# Altium PCB PCB1Good1.PcbDoc (part 2 of 2)
Units mm, origin at the board's own origin, x right, y up, seen from the top; angles counter-clockwise.
Board outline 152.4 x 101.6 mm, 2 copper layers (Top Layer, Bottom Layer); 118 components, 130 nets, 525 pads, 93 vias.
Unrouted connection lines stored in the file: 31.
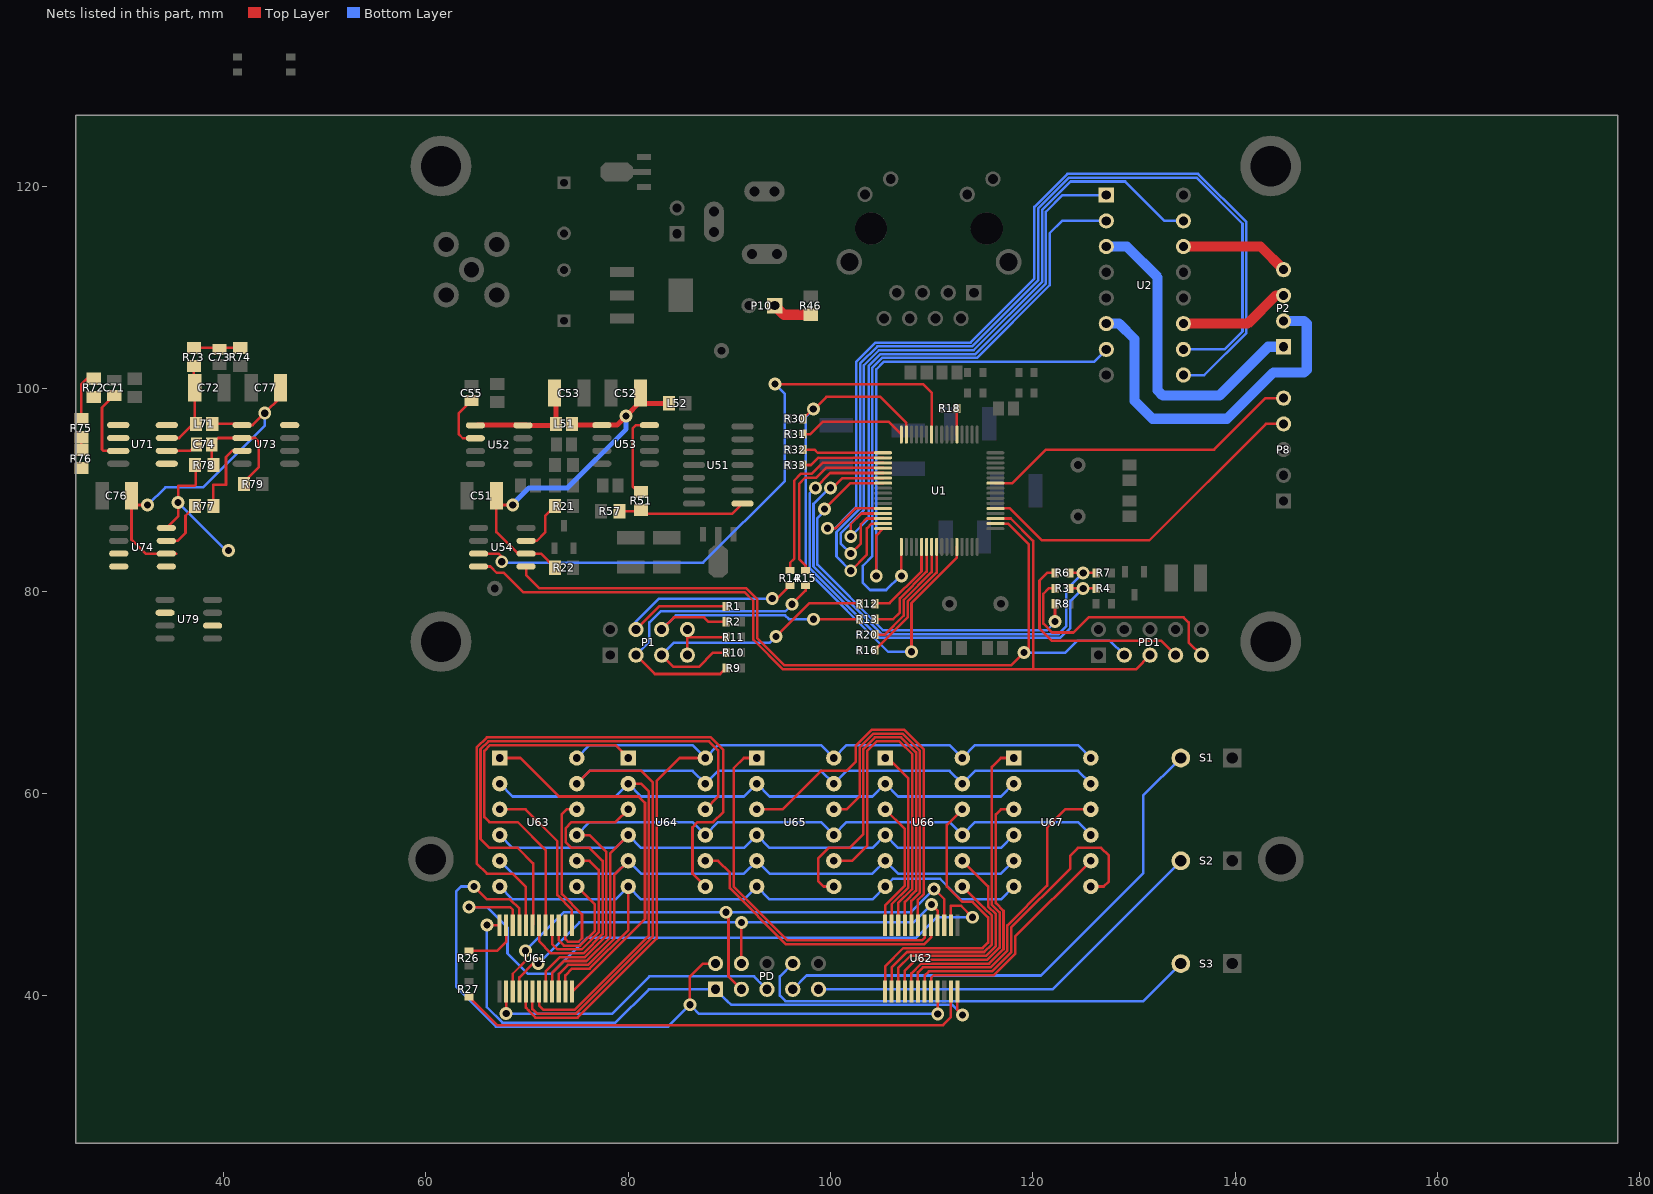
[diagram p2: the nets of this part, all layers, seen from the top]

## Via types
v1: diameter 1.27, hole 0.711, Top Layer to Bottom Layer, 92 vias
v2: diameter 1.27, hole 0.711, Top Layer to Bottom Layer, tented top, 1 vias

## Nets (pads, with @x,y where several pads share a name; then routed paths per layer and width w, separated by ;. In a path a pad name is that pad's centre, name@x,y a point inside that pad or via, vN(x,y) a via of type N, cw(c..) or ccw(c..) an arc to the next point about the centre after c; other vN are vias at no path point) (continued)
NetC51_1: C51.1 C52.1 C76.1 C77.1 L51.2 L52.1 L71.2 R22.2 U53.1 U54.6 U73.1 U74.6 U79.2 | length 76.5
  Top Layer w0.254: C76.1@30.914,89.408 C76.1@30.914,88.5 ; v1(32.5,88.5) C76.1@30.914,88.5 ; 35.307,83.693 U74.6@34.354,83.693 32.307,83.693 30.914,85.086 C76.1@30.914,88.5 ; L71.2@38.9,96.52 U73.1@41.719,96.52 ; U73.1@41.846,96.393 42.893,96.393 v1(44.079,97.579) 45.646,99.146 C77.1@45.646,100.076 ; C51.1@66.982,89.408 C51.1@66.982,88.5 ; v1@68.8,88.5 v1(68.6,88.5) C51.1@66.982,88.5 ; R22.2@72.76,82.296 71.363,83.693 U54.6@69.914,83.693 69.107,83.693 66.982,85.818 C51.1@66.982,88.5 ; L51.2@74.46,96.52 L51.2@74.587,96.393 ; U53.1@77.221,96.451 77.279,96.393 U53.1@77.406,96.393 ; C52.1@81.36,98.552 81.206,98.706 C52.1@81.206,99.568 C52.1@81.714,99.06
  Top Layer w0.5: L51.2@74.587,96.393 U53.1@77.279,96.393 ; U53.1@77.406,96.393 78.893,96.393 v1(79.8,97.3) C52.1@81.206,98.706 ; C52.1@81.36,98.552 L52.1@84.036,98.552
  Bottom Layer w0.254: v1(32.5,88.5) 34.25,90.25 38,90.25 44.079,96.329 v1(44.079,97.579) ; v1(68.6,88.5) 68.7,88.4 v1@68.7,88.7
  Bottom Layer w0.5: v1@68.7,88.7 70.2,90.2 74,90.2 79.8,96 v1(79.8,97.3)
NetC53_2: C53.2 U52.1 | length 11.6
  Top Layer w0.254: 70.061,96.266 70.315,96.52 ; 72.71,96.37 72.86,96.52 ; C53.2@72.718,99.568 C53.2@72.86,99.426
  Top Layer w0.5: U52.1@65.087,96.393 69.934,96.393 ; 69.602,96.37 72.71,96.37 ; 72.86,96.52 C53.2@72.86,99.426
NetC55_2: C55.2 U52.2 | length 5.7
  Top Layer w0.254: C55.2@64.516,98.818 63.246,97.548 63.246,95.504 63.65,95.1 U52.2@64.902,95.1
NetC71_2: C71.2 R72.1 U71.3 | length 6.5
  Top Layer w0.254: U71.3@28.588,93.853 28.147,93.853 28,94 28,97.5 28,98.12 C71.2@29.206,99.326
NetC72_2: C72.2 L71.1 R73.2 U71.7 | length 9.2
  Top Layer w0.254: U71.7@34.404,95.123 35.623,95.123 36.75,96.25 37.03,96.25 L71.1@37.3,96.52 37.158,96.662 C72.2@37.158,100.076 ; C72.2@37.084,100.15 R73.2@37.084,102.224
NetC73_2: C73.2 R72.2 R73.1 R74.2 R75.2 | length 9.5
  Top Layer w0.254: R75.2@25.958,97.008 25.958,100.458 26.476,100.976 R72.2@27.174,100.976 ; R73.1@37.084,104.024 R74.2@41.656,104.024
NetC74_1: C74.1 R76.1 U71.6 | length 3.2
  Top Layer w0.254: U71.6@34.404,93.853 36.715,93.853 C74.1@37.35,94.488
NetC74_2: C74.2 R78.1 R79.2 U73.2 | length 11.5
  Top Layer w0.254: R78.1@39,92.456 38.85,92.606 C74.2@38.85,94.488 39.485,95.123 U73.2@41.846,95.123 43.127,95.123 43.5,94.75 43.5,92.25 R79.2@42.231,90.981
NetC75_2: R78.2 U74.8 U79.6 | length 15.9
  Top Layer w0.254: U74.8@33.733,86.233 U74.8@33.983,86.233 ; U74.8@34.354,86.233 35.536,87.415 35.536,90.424 37.174,90.424 37.25,90.5 37.25,92.406 R78.2@37.2,92.456 ; v1@40.281,84.219 v1(40.5,84)
  Bottom Layer w0.254: v1(35.5,88.75) 40.25,84 v1(40.5,84)
NetL51_1: L51.1 U52.8
NetP1_3: P1.3 R9.1 R15.1 | length 31.1
  Top Layer w0.254: P1.3@80.772,73.66 82.632,71.8 89.084,71.8 R9.1@89.674,72.39 ; v1@96.266,78.74 96.226,78.7 v1(96.2,78.7) 97.536,80.036 R15.1@97.536,80.53
  Bottom Layer w0.254: P1.3@80.772,73.66 82.1,74.988 82.1,76.9 83.2,78 95.526,78 96.226,78.7 v1(96.2,78.7)
NetP1_4: P1.4 R1.1 R14.1 | length 27.3
  Top Layer w0.254: P1.4@80.772,76.2 83.058,78.486 R1.1@89.674,78.486 ; v1(94.234,79.248) 94.73,79.248 R14.1@96.012,80.53
  Bottom Layer w0.254: P1.4@80.772,76.2 80.772,76.972 83.048,79.248 v1(94.234,79.248)
NetP1_5: P1.5 R10.1 R12.1 | length 29.1
  Top Layer w0.254: P1.5@83.312,73.66 84.472,72.5 86.986,72.5 88.4,73.914 R10.1@89.674,73.914 ; v1(94.6,75.5) 97.9,78.8 R12.1@102.882,78.8
  Bottom Layer w0.254: P1.5@83.312,73.66 84.552,74.9 87,74.9 94,74.9 v1(94.6,75.5)
NetP1_6: P1.6 R2.1 R13.1 | length 27.3
  Top Layer w0.254: P1.6@83.312,76.2 84.512,77.4 87.5,77.4 87.938,76.962 R2.1@89.674,76.962 ; v1(98.316,77.216) R13.1@102.882,77.216
  Bottom Layer w0.254: P1.6@83.312,76.2 84.712,77.6 95.5,77.6 95.884,77.216 v1(98.316,77.216)
NetP1_7: P1.7 P1.8 R11.1 | length 6.4
  Top Layer w0.254: P1.7@85.852,73.66 P1.8@85.852,76.2 ; 85.852,75.438 86.614,75.438 R11.1@89.674,75.438
NetP2_1: P2.1 U2.3 | length 32.2
  Bottom Layer w1: U2.3@127.254,114.046 129.286,114.046 132.334,110.998 132.334,99.822 132.842,99.314 138.43,99.314 143.256,104.14 P2.1@144.78,104.14
NetP2_2: P2.2 U2.6 | length 36.2
  Bottom Layer w1: U2.6@127.254,106.426 128.524,106.426 130.048,104.902 130.048,98.806 131.826,97.028 139.192,97.028 143.764,101.6 146.812,101.6 147.066,101.854 147.066,106.426 146.812,106.68 P2.2@144.78,106.68
NetP2_3: P2.3 U2.11 | length 11.1
  Top Layer w1: U2.11@134.874,106.426 141.224,106.426 144.018,109.22 P2.3@144.78,109.22
NetP2_4: P2.4 U2.14 | length 10.9
  Top Layer w1: U2.14@134.874,114.046 142.494,114.046 P2.4@144.78,111.76
NetP8_4: P8.4 U1.37 | length 34.6
  Top Layer w0.254: U1.37@116.294,88.166 117.734,88.166 120.9,85 131.5,85 143.02,96.52 P8.4@144.78,96.52
NetP8_5: P8.5 U1.42 | length 32
  Top Layer w0.254: U1.42@116.294,90.666 117.966,90.666 121.28,93.98 127.793,93.98 137.922,93.98 143.002,99.06 P8.5@144.78,99.06
NetP10_1: P10.1 R46.2 | length 3.9
  Top Layer w1: P10.1@94.488,108.204 95.388,107.304 R46.2@98.044,107.304
NetPD1_7: PD1.7 R6.1 | length 21.1
  Top Layer w0.254: R6.1@122.186,81.788 121.412,81.788 120.65,81.026 120.65,76.296 121.846,75.1 132.672,75.1 PD1.7@134.112,73.66
NetPD1_9: PD1.9 R3.2 | length 23.8
  Top Layer w0.254: R3.2@122.186,80.264 121.564,80.264 121.031,79.731 121.031,76.769 121.9,75.9 124,75.9 125.5,77.4 134.904,77.4 135.4,76.904 135.4,74.912 PD1.9@136.652,73.66 PD1.9@136.652,73.848
NetPD_1: PD.1 U61.24 U62.24 | length 61.9
  Top Layer w0.254: v1(66.04,46.99) 66.067,46.963 U61.24@67.291,46.963 ; U62.24@112.541,40.413 112.541,38.589 v1(113.03,38.1)
  Bottom Layer w0.254: v1(66.04,46.99) 66.04,38.862 67.56,37.342 78.744,37.342 82.042,40.64 PD.1@88.646,40.64 89.789,39.497 90.196,39.09 106.654,39.09 110.223,39.09 112.04,39.09 v1(113.03,38.1)
NetPD_2: PD.2 U61.21 U62.21 | length 77.3
  Top Layer w0.254: v1(64.77,50.8) 66.04,49.53 68.326,49.53 69.241,48.615 U61.21@69.241,46.963 ; v1(86.106,39.116) 86.106,41.91 87.376,43.18 PD.2@88.646,43.18 ; v1@110.49,38.1 v1(110.591,38.201) U62.21@110.591,40.413
  Bottom Layer w0.254: v1(64.77,50.8) 63.5,50.8 62.992,50.292 62.992,40.894 66.925,36.961 83.951,36.961 v1(86.106,39.116) 86.106,38.862 86.36,38.862 87.021,38.201 99.984,38.201 v1(110.591,38.201)
NetPD_3: PD.3 U61.3 U62.3 | length 59.9
  Top Layer w0.254: U61.3@68.591,40.413 68.591,42.175 69.85,43.434 v1(69.85,44.45) ; v1(89.662,48.26) 89.662,47.752 89.916,47.752 89.916,41.91 PD.3@91.186,40.64 ; v1(110.236,50.546) 111.241,49.541 U62.3@111.241,46.963
  Bottom Layer w0.254: v1(69.85,44.45) 73.66,48.26 v1(89.662,48.26) 107.95,48.26 v1(110.236,50.546)
NetPD_4: PD.4 U61.4 U62.4 | length 51.5
  Top Layer w0.254: U61.4@69.241,40.413 69.241,41.809 70.612,43.18 v1(71.12,43.18) ; PD.4@91.186,43.18 v1(91.186,47.244) ; v1(109.982,49.022) 110.591,48.413 U62.4@110.591,46.963
  Bottom Layer w0.254: v1(71.12,43.18) 75.184,47.244 v1(91.186,47.244) 108.204,47.244 v1(109.982,49.022)
NetPD_5: PD.5 U61.2 | length 30
  Top Layer w0.254: v1(67.941,38.231) U61.2@67.941,40.413
  Bottom Layer w0.254: v1(67.941,38.231) 78.431,38.231 82.11,41.91 92.456,41.91 PD.5@93.726,40.64
NetPD_7: PD.7 S1.2 | length 52.3
  Bottom Layer w0.254: PD.7@96.266,40.64 97.626,42 120.8,42 130.9,52.1 130.9,59.78 S1.2@134.62,63.5
NetPD_8: PD.8 S3.2 | length 45.1
  Bottom Layer w0.254: PD.8@96.266,43.18 94.986,41.9 94.986,40.014 95.529,39.471 130.911,39.471 S3.2@134.62,43.18
NetPD_9: PD.9 S2.2 | length 41.1
  Bottom Layer w0.254: PD.9@98.806,40.64 121.92,40.64 S2.2@134.62,53.34
NetR3_1: R3.1 R4.1 U1.5 | length 51.7
  Top Layer w0.254: v1(98.5,90.2) 99.966,91.666 U1.5@105.194,91.666 ; R3.1@123.686,80.264 v1(124.968,80.264) R4.1@126.25,80.264
  Bottom Layer w0.254: v1@98.65,90.35 97.938,89.638 97.938,82.284 104.859,75.363 122.694,75.363 123.698,76.367 123.698,78.994 v1(124.968,80.264)
NetR6_2: R6.2 R7.1 U1.6 | length 50.6
  Top Layer w0.254: v1(100,90.2) 100.2,90.2 101.166,91.166 U1.6@105.194,91.166 ; R6.2@123.686,81.788 v1(124.968,81.788) R7.1@126.25,81.788
  Bottom Layer w0.254: v1@100,90 99.7,90 98.319,88.619 98.319,82.442 105.017,75.744 122.536,75.744 123.317,76.525 123.317,80.137 v1(124.968,81.788)
NetR8_1: R8.1 U1.7 | length 41.2
  Top Layer w0.254: v1@99.529,87.971 v1(99.4,88.1) 101.966,90.666 U1.7@105.194,90.666 ; v1@122.174,76.962 v1(122.186,76.974) R8.1@122.186,78.74
  Bottom Layer w0.254: v1(99.4,88.1) 99.4,87.9 98.7,87.2 98.7,82.6 105.175,76.125 121.412,76.125 122.186,76.899 v1(122.186,76.974)
NetR12_2: R12.2 U1.21 | length 8.3
  Top Layer w0.254: R12.2@104.382,78.8 105.845,78.8 108.994,81.949 U1.21@108.994,84.366
NetR13_2: R13.2 U1.22 | length 10.3
  Top Layer w0.254: R13.2@104.382,77.216 106.2,77.216 106.857,77.873 106.857,79.273 109.494,81.91 U1.22@109.494,84.366
NetR14_2: R14.2 U1.3 | length 18.6
  Top Layer w0.254: R14.2@96.012,82.03 96.012,82.796 96.4,83.184 96.4,90.9 97.1,91.6 98.161,91.6 99.227,92.666 U1.3@105.194,92.666
NetR15_2: R15.2 U1.4 | length 17.8
  Top Layer w0.254: R15.2@97.536,82.03 97.536,82.518 96.9,83.154 96.9,90.6 97.5,91.2 98.6,91.2 99.566,92.166 U1.4@105.194,92.166
NetR16_2: R16.2 U1.24 | length 12.7
  Top Layer w0.254: R16.2@104.382,74.168 104.384,74.168 107.619,77.403 107.619,78.958 110.494,81.833 U1.24@110.494,84.366
NetR18_2: R18.2 U1.53 | length 2.6
  Top Layer w0.254: U1.53@112.494,95.466 R18.2@112.494,98.044
NetR20_2: R20.2 U1.23 | length 11.6
  Top Layer w0.254: R20.2@104.382,75.692 105.37,75.692 107.238,77.56 107.238,79.116 109.994,81.872 U1.23@109.994,84.366
NetR21_1: R21.1 U54.7 | length 5.9
  Top Layer w0.254: U54.7@70.637,84.963 U54.7@69.914,84.963 70.963,84.963 71.8,85.8 71.8,87.432 R21.1@72.76,88.392
NetR26_2: R26.2 U61.23 | length 5.7
  Top Layer w0.254: R26.2@64.262,44.438 67.044,44.438 67.941,45.335 U61.23@67.941,46.963
NetR27_2: R27.2 U62.23 | length 51.6
  Top Layer w0.254: R27.2@64.262,39.89 67.052,37.1 111.113,37.1 111.891,37.878 U62.23@111.891,40.413
NetR30_1: R30.1 U1.28 U1.63 | length 56
  Top Layer w0.254: R30.1@97.27,97.028 98.242,98 v1(98.3,98) ; v1@98,97.6 98.7,98.3 99.581,99.181 104.919,99.181 107.494,96.606 U1.63@107.494,95.466 ; v1(108,74) 108,78.8 112.494,83.294 U1.28@112.494,84.366
  Bottom Layer w0.254: v1(98.3,98) 98.211,97.911 97.557,97.257 97.557,82.127 105.684,74 v1(108,74)
NetR31_1: R31.1 U1.64 | length 11.1
  Top Layer w0.254: R31.1@97.516,95.75 R31.1@97.27,95.504 98.004,95.504 99.25,96.75 105.71,96.75 U1.64@106.994,95.466
NetR32_1: R32.1 U1.1 | length 8.1
  Top Layer w0.254: R32.1@97.27,93.98 98.42,93.98 98.734,93.666 U1.1@105.194,93.666
NetR33_1: R33.1 U1.2 | length 8.2
  Top Layer w0.254: R33.1@97.27,92.456 98.056,92.456 98.766,93.166 U1.2@105.194,93.166
NetR51_1: R51.1 R57.2 U51.8 | length 12.8
  Top Layer w0.254: R57.2@79.132,87.884 81.164,87.884 R51.1@81.28,88 81.65,87.63 90.284,87.63 U51.8@91.3,88.646
NetR51_2: R51.2 U53.8 U73.8 | length 8.5
  Top Layer w0.254: R51.2@81.2,89.546 80.438,90.308 80.438,96.059 80.772,96.393 U53.8@81.979,96.393
NetR75_1: R75.1 R76.2 U71.2 | length 1.2
  Top Layer w0.254: R76.2@25.958,93.96 R75.1@25.958,95.208
NetR77_1: R77.1 U73.3 | length 8
  Top Layer w0.254: R77.1@39,88.392 39,90.5 40.25,90.5 40.25,93.25 40.853,93.853 U73.3@41.846,93.853
NetR77_2: R77.2 U74.7 | length 4.9
  Top Layer w0.254: U74.7@34.713,84.963 35.463,84.963 36.25,85.75 36.25,87.442 R77.2@37.2,88.392
NetU1_12: U1.12 U2.9 | length 96.6
  Top Layer w0.254: v1(99.7,86.2) 99.7,86.6 100.1,86.2 100.5,86.2 102.466,88.166 U1.12@105.194,88.166
  Bottom Layer w0.254: v1@99.7,86.6 v1(99.7,86.2) 100.422,86.2 101.933,87.711 102.538,88.316 102.538,102.632 104.465,104.559 113.834,104.559 120.142,110.867 120.142,117.958 123.422,121.238 136.318,121.238 141.097,116.459 141.097,105.506 136.937,101.346 U2.9@134.874,101.346
NetU1_13: U1.13 U2.1 | length 57
  Top Layer w0.254: v1(102,85.4) 102,86.6 103.066,87.666 U1.13@105.194,87.666
  Bottom Layer w0.254: v1(102,85.4) 103.759,87.159 103.759,102.237 104.938,103.416 114.307,103.416 121.285,110.394 121.285,117.485 122.926,119.126 U2.1@127.254,119.126
NetU1_14: U1.14 U2.15 | length 70.6
  Top Layer w0.254: v1(102,83.7) 103,84.7 103,86.6 103.566,87.166 U1.14@105.194,87.166
  Bottom Layer w0.254: v1(102,83.7) 101,84.7 101,85.7 102.249,86.949 103.3,88 103.3,102.316 104.781,103.797 114.149,103.797 120.904,110.552 120.904,117.643 123.737,120.476 129.124,120.476 133.014,116.586 U2.15@134.874,116.586
NetU1_15: U1.15 U2.10 | length 97.3
  Top Layer w0.254: v2(102,82) 103.6,83.6 103.6,86.2 104.066,86.666 U1.15@105.194,86.666
  Bottom Layer w0.254: v2(102,82) 100.589,83.411 100.589,85.828 102.091,87.33 102.919,88.158 102.919,102.474 104.623,104.178 113.992,104.178 120.523,110.709 120.523,117.801 123.579,120.857 136.16,120.857 140.716,116.301 140.716,105.664 138.938,103.886 U2.10@134.874,103.886
NetU1_16: U1.16 U2.7 | length 48.9
  Top Layer w0.254: v1(104.521,81.5) 104.521,85.493 U1.16@105.194,86.166
  Bottom Layer w0.254: v1(104.521,81.5) 104.521,101.921 105.254,102.654 123.712,102.654 126.022,102.654 U2.7@127.254,103.886
NetU1_17: U1.17 U2.2 | length 61.3
  Top Layer w0.254: U1.17@106.994,84.366 v1(107,81.5)
  Bottom Layer w0.254: v1(107,81.5) 106.9,81.5 105.5,80.1 103.9,80.1 103.2,80.8 103.2,82.5 104.14,83.44 104.14,102.079 105.096,103.035 114.465,103.035 121.666,110.236 121.666,115.366 122.886,116.586 U2.2@127.254,116.586
NetU61_5: U61.5 U63.12 U64.12 U65.12 U66.12 U67.12 | length 94.8
  Top Layer w0.254: U61.5@69.891,40.413 69.891,38.821 70.16,38.552 70.16,38.521 70.835,37.846 74.992,37.846 82.804,45.658 82.804,61.214 85.09,63.5 U64.12@87.63,63.5
  Bottom Layer w0.254: U63.12@74.93,63.5 76.2,64.77 86.36,64.77 U64.12@87.63,63.5 88.9,64.77 99.06,64.77 U65.12@100.33,63.5 101.6,64.77 111.76,64.77 U66.12@113.03,63.5 114.3,64.77 124.46,64.77 U67.12@125.73,63.5 U67.12@125.476,63.5
NetU61_6: U61.6 U63.11 U64.11 U65.11 U66.11 U67.11 | length 95.7
  Top Layer w0.254: U61.6@70.541,40.413 70.541,38.679 70.993,38.227 71.47,38.227 74.834,38.227 82.423,45.816 82.423,61.118 81.311,62.23 76.2,62.23 U63.11@74.93,60.96
  Bottom Layer w0.254: U63.11@74.93,60.96 76.2,62.23 86.36,62.23 U64.11@87.63,60.96 88.9,62.23 99.06,62.23 U65.11@100.33,60.96 101.6,62.23 111.76,62.23 U66.11@113.03,60.96 114.3,62.23 124.46,62.23 U67.11@125.73,60.96
NetU61_7: U61.7 U63.2 U64.2 U65.2 U66.2 U67.2 | length 87
  Top Layer w0.254: U61.7@71.191,40.413 71.191,39.045 71.628,38.608 74.676,38.608 82.042,45.974 82.042,60.198 81.28,60.96 U64.2@80.01,60.96
  Bottom Layer w0.254: U63.2@67.31,60.96 68.58,59.69 78.74,59.69 U64.2@80.01,60.96 81.28,59.69 91.44,59.69 U65.2@92.71,60.96 93.98,59.69 104.14,59.69 U66.2@105.41,60.96 106.68,59.69 116.84,59.69 U67.2@118.11,60.96
NetU61_8: U61.8 U63.9 U64.9 U65.9 U66.9 U67.9 | length 76.4
  Top Layer w0.254: U61.8@71.841,40.413 71.841,42.377 73.279,43.815 75.727,43.815 77.851,45.939 77.851,54.229 76.2,55.88 U63.9@74.93,55.88
  Bottom Layer w0.254: U63.9@74.93,55.88 76.2,57.15 86.36,57.15 U64.9@87.63,55.88 88.9,57.15 99.06,57.15 U65.9@100.33,55.88 101.6,57.15 111.76,57.15 U66.9@113.03,55.88 114.3,57.15 124.46,57.15 U67.9@125.73,55.88
NetU61_9: U61.9 U63.4 U64.4 U65.4 U66.4 U67.4 | length 74.9
  Top Layer w0.254: U61.9@72.491,40.413 72.491,42.265 73.66,43.434 75.884,43.434 78.232,45.782 78.232,54.102 U64.4@80.01,55.88
  Bottom Layer w0.254: U63.4@67.31,55.88 68.58,54.61 78.74,54.61 U64.4@80.01,55.88 81.28,54.61 91.44,54.61 U65.4@92.71,55.88 93.98,54.61 104.14,54.61 U66.4@105.41,55.88 106.68,54.61 116.84,54.61 U67.4@118.11,55.88
NetU61_10: U61.10 U63.5 U64.5 U65.5 U66.5 U67.5 | length 72
  Top Layer w0.254: U61.10@73.141,40.413 73.141,42.153 74.041,43.053 76.042,43.053 78.613,45.624 78.613,51.943 U64.5@80.01,53.34
  Bottom Layer w0.254: U63.5@67.31,53.34 68.58,52.07 78.74,52.07 U64.5@80.01,53.34 81.28,52.07 91.44,52.07 U65.5@92.71,53.34 93.98,52.07 104.14,52.07 U66.5@105.41,53.34 106.68,52.07 116.84,52.07 U67.5@118.11,53.34
NetU61_11: U61.11 U63.6 U64.6 U65.6 U66.6 U67.6 | length 70.1
  Top Layer w0.254: U61.11@73.791,40.413 73.791,42.01 74.453,42.672 76.2,42.672 80.01,46.482 U64.6@80.01,50.673 ; U64.6@79.883,50.673 U64.6@80.01,50.673 ; U64.6@80.01,50.673 80.137,50.673 U64.6@80.01,50.8 U64.6@80.01,50.673
  Bottom Layer w0.254: U63.6@67.31,50.8 68.58,49.53 78.74,49.53 U64.6@80.01,50.8 81.28,49.53 91.44,49.53 U65.6@92.71,50.8 93.98,49.53 104.14,49.53 U66.6@105.41,50.8 106.172,51.562 110.831,51.562 112.863,49.53 113.705,49.53 115.062,49.53 116.84,49.53 U67.6@118.11,50.8
NetU61_12: U61.12 U63.1 | length 37.8
  Top Layer w0.254: U63.1@67.31,63.5 69.342,63.5 73.152,59.69 81.026,59.69 81.661,59.055 81.661,47.594 74.48,40.413 U61.12@74.441,40.413
NetU61_13: U61.13 U63.3 | length 15.9
  Top Layer w0.254: U63.3@67.31,58.42 69.85,58.42 73,55.27 73,49.936 74.441,48.495 U61.13@74.441,46.963
NetU61_14: U61.14 U63.10 | length 18
  Top Layer w0.254: U61.14@73.791,46.963 73.791,45.589 74.041,45.339 75.095,45.339 75.438,45.682 75.438,48.037 73.441,50.034 73.441,57.941 73.92,58.42 U63.10@74.93,58.42
NetU61_15: U61.15 U63.7 | length 11
  Top Layer w0.254: U61.15@73.141,46.963 73.141,45.477 73.66,44.958 75.253,44.958 76.708,46.413 76.708,49.022 U63.7@74.93,50.8
NetU61_16: U61.16 U63.8 | length 16.1
  Top Layer w0.254: U61.16@72.491,46.963 72.491,45.111 73.025,44.577 75.411,44.577 77.089,46.255 77.089,52.451 76.2,53.34 U63.8@74.93,53.34
NetU61_17: U61.17 U64.1 | length 36.4
  Top Layer w0.254: U61.17@71.841,46.963 71.841,50.556 71.841,53.302 71.841,54.397 69.088,57.15 66.294,57.15 65.786,57.658 65.786,64.208 66.348,64.77 78.74,64.77 U64.1@80.01,63.5
NetU61_18: U61.18 U64.3 | length 29.1
  Top Layer w0.254: U61.18@71.191,46.963 71.191,45.395 72.39,44.196 75.569,44.196 77.47,46.097 77.47,53.34 76.2,54.61 74.422,54.61 73.822,55.21 73.822,56.55 74.422,57.15 78.74,57.15 U64.3@80.01,58.42
NetU61_19: U61.19 U64.10 | length 51.8
  Top Layer w0.254: U61.19@70.541,46.963 70.612,47.034 70.612,50.992 70.612,53.086 69.088,54.61 66.294,54.61 65.405,55.499 65.405,64.366 66.19,65.151 88.011,65.151 88.9,64.262 88.9,59.69 U64.10@87.63,58.42
NetU61_20: U61.20 U64.7 | length 62.6
  Top Layer w0.254: U61.20@69.891,46.963 69.891,50.759 68.58,52.07 66.04,52.07 65.024,53.086 65.024,64.524 66.032,65.532 88.169,65.532 89.408,64.293 89.408,58.166 88.392,57.15 86.868,57.15 86.36,56.642 86.36,52.07 U64.7@87.63,50.8
NetU61_22: U61.22 U62.2 | length 66.9
  Top Layer w0.254: v1(64.262,48.768) 68.326,48.768 68.591,48.503 U61.22@68.591,46.963 ; U62.2@111.891,46.963 111.891,48.895 ; 111.891,48.899 111.891,48.895 ; v1(114.046,47.752) 112.903,48.895 111.891,48.895
  Bottom Layer w0.254: v1(64.262,48.768) 66.04,48.768 68.072,46.736 68.072,44.196 70.104,42.164 72.39,42.164 75.946,45.72 83.764,45.72 99.401,45.72 108.458,45.72 110.49,47.752 v1(114.046,47.752)
NetU62_5: U62.5 U64.8 | length 28.1
  Top Layer w0.254: U64.8@87.63,53.34 88.9,53.34 90.043,52.197 90.043,50.642 95.6,45.085 107.03,45.085 107.253,45.085 107.405,45.085 107.425,45.085 109.255,45.085 109.763,45.593 109.941,45.771 U62.5@109.941,46.963
NetU62_6: U62.6 U65.1 | length 36.8
  Top Layer w0.254: U65.1@92.71,63.5 91.44,63.5 90.424,62.484 90.424,50.8 95.758,45.466 106.872,45.466 107.583,45.466 109.035,45.466 109.291,45.722 U62.6@109.291,46.963
NetU62_7: U62.7 U65.3 | length 39.1
  Top Layer w0.254: U65.3@92.71,58.42 95.25,58.42 99.06,62.23 101.6,62.23 102.489,63.119 102.489,64.705 104.078,66.294 107.28,66.294 109.22,64.354 109.22,50.069 108.641,49.49 U62.7@108.641,46.963
NetU62_8: U62.8 U65.10 | length 32.8
  Top Layer w0.254: U65.10@100.33,58.42 101.6,58.42 102.87,59.69 102.87,64.548 104.235,65.913 107.123,65.913 108.839,64.197 108.839,50.227 107.991,49.379 U62.8@107.991,46.963
NetU62_9: U62.9 U65.7 | length 41.9
  Top Layer w0.254: U65.7@100.33,50.546 U65.7@100.33,50.8 99.314,50.8 98.806,51.308 98.806,53.594 99.822,54.61 101.854,54.61 103.251,56.007 103.251,64.39 104.393,65.532 106.965,65.532 108.458,64.039 108.458,50.384 107.341,49.267 U62.9@107.341,46.963
NetU62_10: U62.10 U65.8 | length 36.2
  Top Layer w0.254: U65.8@100.33,53.34 102.14,53.34 103.632,54.832 103.632,64.232 104.551,65.151 106.807,65.151 108.077,63.881 108.077,50.542 106.691,49.156 U62.10@106.691,46.963
NetU62_11: U62.11 U66.1 | length 18.3
  Top Layer w0.254: U66.1@105.41,63.5 105.664,63.5 107.696,61.468 107.696,50.7 106.041,49.045 U62.11@106.041,46.963
NetU62_12: U62.12 U66.3 | length 13
  Top Layer w0.254: U62.12@105.391,46.963 105.391,48.934 107.315,50.858 107.315,56.515 U66.3@105.41,58.42
NetU62_13: U62.13 U66.10 | length 29.7
  Top Layer w0.254: U62.13@105.391,40.413 105.391,42.907 107.188,44.704 115.032,44.704 115.57,45.242 115.57,47.752 114.046,49.276 113.03,49.276 112.331,49.974 111.506,50.8 111.506,56.896 U66.10@113.03,58.42
NetU62_14: U62.14 U66.7 | length 20.2
  Top Layer w0.254: U62.14@106.041,40.413 106.041,42.795 107.569,44.323 109.509,44.323 109.57,44.323 115.19,44.323 115.951,45.084 115.951,47.91 115.189,48.672 113.061,50.8 U66.7@113.03,50.8
NetU62_15: U62.15 U66.8 | length 22.7
  Top Layer w0.254: U62.15@106.691,40.413 106.691,42.755 107.878,43.942 109.666,43.942 109.728,43.942 115.348,43.942 116.332,44.926 116.332,48.068 115.57,48.83 115.57,50.8 U66.8@113.03,53.34
NetU62_16: U62.16 U67.1 | length 33.1
  Top Layer w0.254: U62.16@107.341,40.413 107.341,42.475 108.427,43.561 109.824,43.561 109.886,43.561 115.506,43.561 116.713,44.768 116.713,48.225 115.951,48.987 115.951,50.958 115.951,62.611 116.84,63.5 U67.1@118.11,63.5
NetU62_17: U62.17 U67.3 | length 27.5
  Top Layer w0.254: U62.17@107.991,40.413 107.991,42.205 108.966,43.18 109.982,43.18 110.044,43.18 115.664,43.18 117.094,44.61 117.094,48.383 116.332,49.145 116.332,51.116 116.332,57.912 116.84,58.42 U67.3@118.11,58.42
NetU62_18: U62.18 U67.10 | length 30.5
  Top Layer w0.254: U62.18@108.641,40.413 108.641,42.316 109.124,42.799 115.821,42.799 117.475,44.453 117.475,46.963 121.412,50.9 121.412,56.642 123.19,58.42 U67.10@125.73,58.42
NetU62_19: U62.19 U67.7 | length 32
  Top Layer w0.254: U62.19@109.291,40.413 109.291,41.981 109.728,42.418 115.979,42.418 117.856,44.295 117.856,46.736 123.698,52.578 123.698,53.848 124.46,54.61 126.746,54.61 127.508,53.848 127.508,51.308 127,50.8 U67.7@125.73,50.8
NetU62_20: U62.20 U67.8 | length 22.9
  Top Layer w0.254: U62.20@109.941,40.413 109.941,41.778 110.2,42.037 114.427,42.037 116.137,42.037 118.237,44.137 118.237,45.847 U67.8@125.73,53.34
NetU71_1: U71.1 U71.5 U71.8
SPI_CLK: PD1.3 U1.34 U54.5 U74.5 | length 82.6
  Top Layer w0.254: U54.5@69.914,82.423 69.914,81.586 71.236,80.264 91.675,80.264 92.742,79.197 92.742,75.358 95.456,72.644 117.856,72.644 v1(119.126,73.914) 119.6,74.388 119.6,84.616 117.55,86.666 U1.34@116.294,86.666
  Bottom Layer w0.254: v1(119.126,73.914) 123.214,73.914 124.4,75.1 127.592,75.1 PD1.3@129.032,73.66
SPI_CS: U1.58 U54.3 U74.3 | length 64.1
  Top Layer w0.254: U54.3@65.214,83.693 67.183,83.693 v1@67.564,83.312 ; v1(94.5,100.457) 94.757,100.2 95.014,100.457 99.241,100.457 105.525,100.457 107.582,100.457 109.143,100.457 109.994,99.606 109.994,97.794 U1.58@109.994,95.466
  Bottom Layer w0.254: v1(67.5,82.9) 67.6,82.8 87.4,82.8 95.496,90.896 95.496,99.461 v1(94.5,100.457)
SPI_SD: PD1.5 U1.35 U54.4 U74.4 | length 90.7
  Top Layer w0.254: U54.4@65.214,82.423 66.377,82.423 67.012,81.788 67.712,81.788 68.75,80.75 69.617,79.883 91.517,79.883 92.361,79.039 92.361,75.2 95.298,72.263 120.015,72.263 ; U1.35@116.294,87.166 117.812,87.166 120.015,84.963 120.015,72.263 ; PD1.5@131.572,73.66 130.175,72.263 120.015,72.263
pads on no net: *1.15 *1.16 D1.3 D2.3 RF1.1 RF1.2 RF2.1 RF2.2 U1.8 U1.11 U1.27 U1.31 U1.32 U1.33 U1.36 U1.43 U1.44 U53.7 U62.22 U73.7 U79.1 U79.3 U79.5 U79.7 U79.8
copper on no net: | length 12.5
  Top Layer w0.254: 79.936,31.508 82.476,31.508 ; 80.952,31 82.476,31.508 ; 80.952,32.016 82.476,31.508 ; 82.476,31.254 82.476,31.762 ; 83.726,31.254 83.726,31.762 ; 85.25,31 83.726,31.508 ; 85.25,32.016 83.726,31.508 ; 86.266,31.508 83.726,31.508

## Polygon pours and split planes (outlines as drawn)
GND on Bottom Layer "Bottom Layer-No Net" (solid, pour order 1000): 56.5,127 56.5,70 148.5,70 148.5,127
GND on Bottom Layer "Bottom Layer-No Net" (solid, pour order 1000): 56.539,69.5 148.5,69.5 148.5,35 56.539,35
GND on Top Layer "Bottom Layer-No Net" (solid, remove dead copper, pour order 1001): 56.5,127 56.5,70 148.5,70 148.5,127
GND on Top Layer "Bottom Layer-No Net" (solid, pour order 1001): 56.5,69.5 148.5,69.5 148.5,35 56.5,35

## Other copper
Top Layer:
  text "1.25 (mm)" at 76.982,27.851 h1.52

## Silkscreen, mask and mechanical layers (free items; w line width, h text height)
Top Overlay:
  lines w0.254: 54.5,36.5 55.008,34.976 ; 54.5,125.452 55.008,126.976 ; 54.754,34.976 55.262,34.976 ; 54.754,126.976 55.262,126.976 ; 55.008,75.872 55.008,34.976 ; 55.008,86.08 55.008,126.976 ; 55.516,36.5 55.008,34.976 ; 55.516,125.452 55.008,126.976 ; 93.183,101.6 93.218,101.565 ; 93.197,80.645 93.218,80.666 ; 149.492,36.524 150,35 ; 149.492,67.976 150,69.5 ; 149.5,71.548 150.008,70.024 ; 149.5,125.5 150.008,127.024 ; 149.746,35 150.254,35 ; 149.746,69.5 150.254,69.5 ; 149.754,70.024 150.262,70.024 ; 149.754,127.024 150.262,127.024 ; 150,45.75 150,35 ; 150,58.75 150,69.5 ; 150.008,93.42 150.008,70.024 ; 150.008,103.628 150.008,127.024 ; 150.508,36.524 150,35 ; 150.508,67.976 150,69.5 ; 150.516,71.548 150.008,70.024 ; 150.516,125.5 150.008,127.024
  text "Ethernet" at 119.634,124.206 h1.52
  text "+12V" at 78.74,123.698 h1.52
  text "INPUT_PMT" at 70.104,104.648 h1.52
  text "Motors" at 142.494,103.886 h1.52 r90
  text "57 (mm)" at 150.922,93.674 h1.52 r90
  text "92 (mm)" at 55.922,76.126 h1.52 r90
  text "SPIDisplay" at 110.1,71.4 h1.52
  text "IR" at 76.2,71.12 h1.52
  text "34.5 (mm)" at 150.914,46.004 h1.52 r90
Top Solder:
  lines w0.254: 56.524,127.738 56.524,128.246 ; 58.048,127.484 56.524,127.992 ; 58.048,128.5 56.524,127.992 ; 97.42,127.992 56.524,127.992 ; 107.628,127.992 148.524,127.992 ; 147,127.484 148.524,127.992 ; 147,128.5 148.524,127.992 ; 148.524,127.738 148.524,128.246
  text "92 (mm)" at 97.674,127.078 h1.52

## Text inside footprints (layer, text, board x,y; h text height)
C100: Top Overlay "+" at 74.41,104.67 h1.5 r90
C101: Top Overlay "+" at 72.91,122.406 h1.5 r270
P1: Top Overlay "2" at 75.692,75.692 h1.27; Top Overlay "1" at 76.2,73.152 h1.27; Top Overlay "7" at 87.376,73.152 h1.27; Top Overlay "8" at 87.376,75.692 h1.27
PD: Top Overlay "2" at 86.106,42.672 h1.27; Top Overlay "1" at 86.614,40.132 h1.27; Top Overlay "9" at 100.33,40.132 h1.27; Top Overlay "10" at 100.33,42.672 h1.27
PD1: Top Overlay "10" at 138.176,75.692 h1.27; Top Overlay "9" at 138.176,73.152 h1.27; Top Overlay "1" at 124.46,73.152 h1.27; Top Overlay "2" at 123.952,75.692 h1.27